# Altium PCB SCMLI_Snipped.PcbDoc (part 2 of 5)
Units mil, origin at the board's own origin, x right, y up, seen from the top; angles counter-clockwise.
Board outline 12129 x 3278 mil, 4 copper layers (Top Layer, GNDPlane, PowRet, Bottom Layer), stack 25.6 mil thick; 452 components, 391 nets, 1786 pads, 827 vias.
Unrouted connection lines stored in the file: 1.
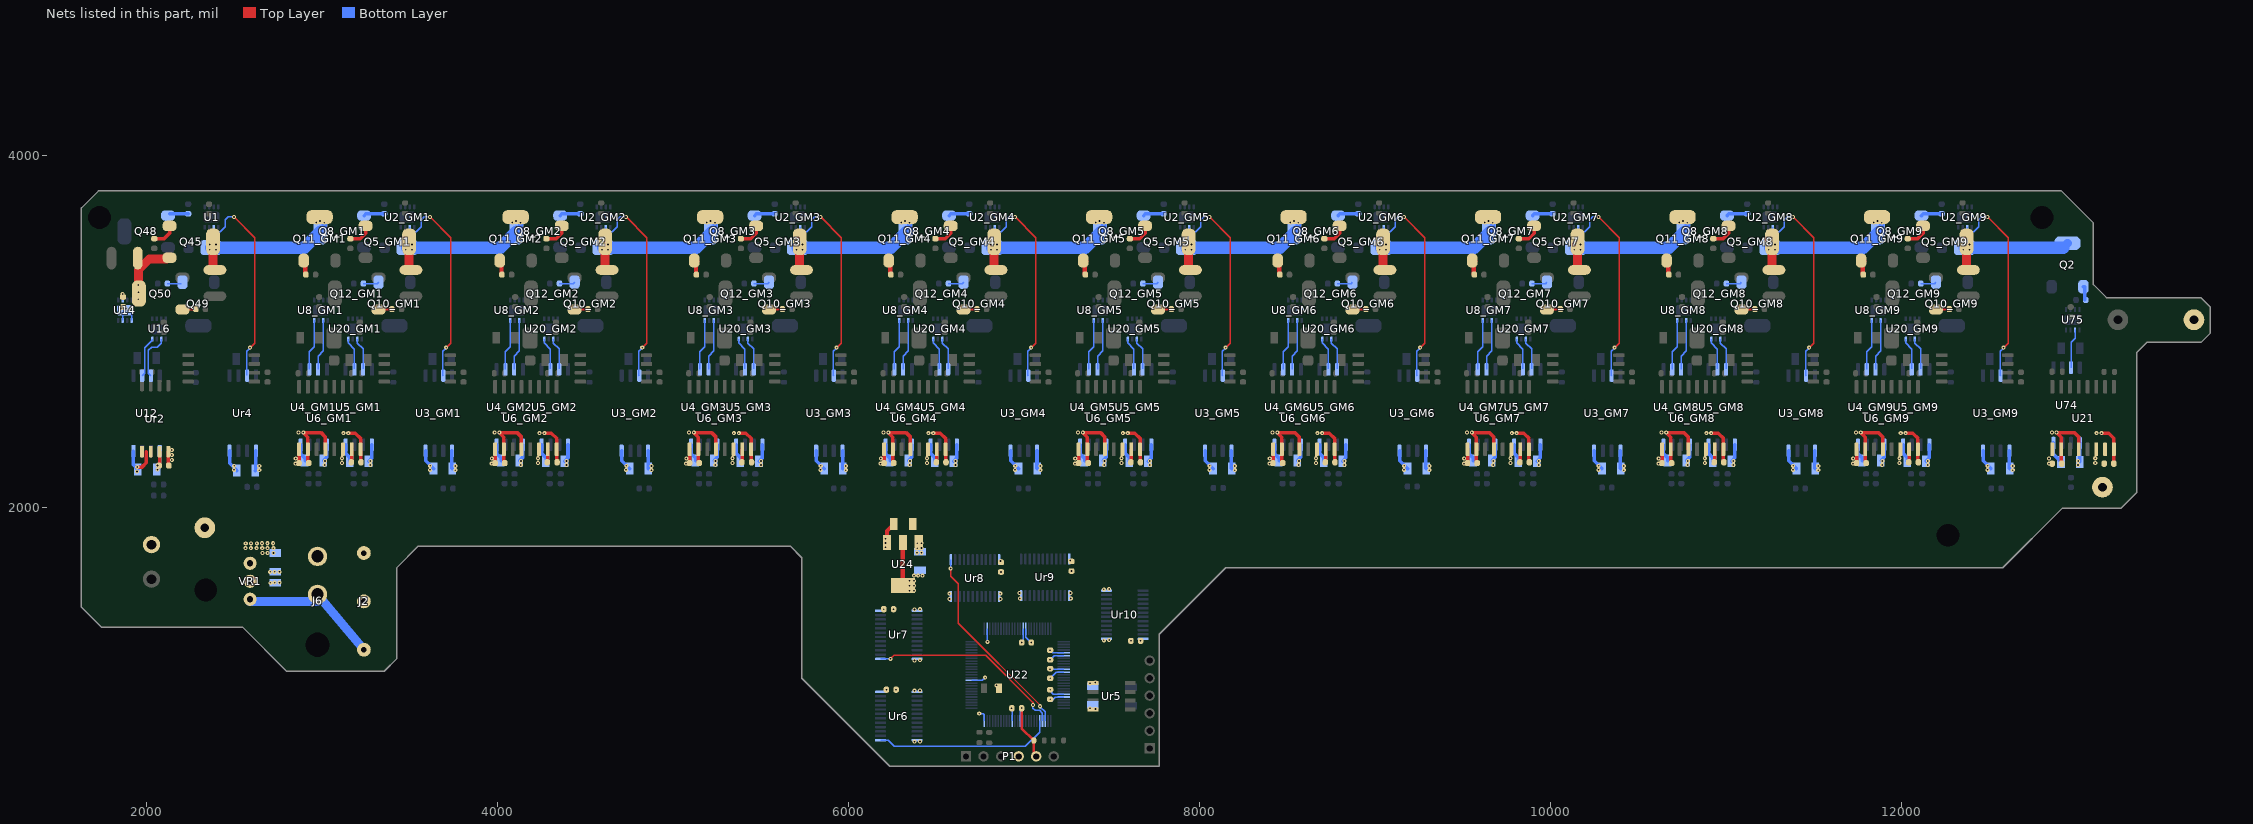
[diagram p4: the nets of this part, all layers, seen from the top]

## Components (designator, comment, footprint, x,y, rotation, side; value= is the part's Value field where it differs from the comment) (continued)
Ur1_GM4 "ADUM5028-5BRIZ" RI_8_1 6877,2790 r0 top value=Value (schematic designator Ur1)
Ur1_GM5 "ADUM5028-5BRIZ" RI_8_1 7985,2790 r0 top value=Value (schematic designator Ur1)
Ur1_GM6 "ADUM5028-5BRIZ" RI_8_1 9093,2790 r0 top value=Value (schematic designator Ur1)
Ur1_GM7 "ADUM5028-5BRIZ" RI_8_1 10201,2790 r0 top value=Value (schematic designator Ur1)
Ur1_GM8 "ADUM5028-5BRIZ" RI_8_1 11309,2790 r0 top value=Value (schematic designator Ur1)
Ur1_GM9 "ADUM5028-5BRIZ" RI_8_1 12417,2790 r0 top value=Value (schematic designator Ur1)
Ur2 "ADUM5028-5BRIZ" RI_8_1 2050,2504 r90 top value=Value
Ur3 "ADUM5028-5BRIZ" RI_8_1 2427,2790 r0 top value=Value
Ur4 "ISO7720FDWV" TI_DWV 2624,2320 r90 bottom
Ur5 "HCPL-0931" SOIC-8 7499,922 r180 top
Ur6 "Part Number: CY74FCT841T_DBQ_24" DBQ24 6287,809 r180 bottom value=Value
Ur7 "Part Number: CY74FCT841T_DBQ_24" DBQ24 6287,1272 r180 bottom value=Value
Ur8 "Part Number: CY74FCT841T_DBQ_24" DBQ24 6720.5,1595.5 r90 bottom value=Value
Ur9 "Part Number: CY74FCT841T_DBQ_24" DBQ24 7120.5,1599.5 r90 bottom value=Value
Ur10 "Part Number: CY74FCT841T_DBQ_24" DBQ24 7574.5,1386.5 r0 bottom value=Value
VR1 "L78series" L78_TO220_3 2591,1577 r90 top

## Footprints (in the part's own frame and the unit in brackets; to place one, negate y for a bottom-side part, rotate by r counter-clockwise, add the part's x,y. Pads: shape width x height; smd on the part's side, far side on the other; paste and mask are expansions set on the pad)
3_TEST_PIN [mm]
  round 2 hole 0.8: 1(-7,0) 2(0,0) 3(7,0)
0805 [mil] "Chip Inductor 2-Leads, Body 2.0x1.2mm, IPC Medium Density"
  rect 35x53.15 smd: 1(-42,0) 2(42,0)
  silkscreen extent -14,-23 14,23, body extent -40,-25 40,25, height 49
1608[0603] [mm] "Chip Capacitor, Body 1.6x0.8mm, IPC High Density"
  rrect75% 0.8x0.9 smd: 1(-0.7,0) 2(0.7,0)
  body extent -0.87,-0.48 0.87,0.48, height 1.3
1812 [mm] "Chip Capacitor, Body 4.5x3.2mm, IPC High Density"
  rrect100% 1.4x3.3 smd: 1(-1.9,0) 2(1.9,0)
  silkscreen extent -0.8,-1.55 0.8,1.55, body extent -2.4,-1.7 2.4,1.7, height 1.4
BatteryConnector_Molex_1720640002 [mm]
  round 3 hole 3.5 unplated paste+0 mask+0: 0(-7.3,0)
  round 2.8 hole 1.8: 1(0,0) 2(5.5,0)
  silkscreen extent -15.75,-4.06 6.22,4.19, body extent -15.74,-4.16 6.22,4.19, height 15.05
C1206 [mm] "Chip Capacitor, Body 3.2x1.6mm, IPC High Density"
  rect 1.1x1.7 smd: 1(-1.35,0) 2(1.35,0)
  silkscreen extent -0.4,-0.75 0.4,0.75, body extent -1.7,-0.9 1.7,0.9, height 1.3
DBQ24 [mil]
  rrect50% 63x14 smd paste+0 mask+0: 1(-104.5,137.5) 2(-104.5,112.5) 3(-104.5,87.5) 4(-104.5,62.5) 5(-104.5,37.5) 6(-104.5,12.5) 7(-104.5,-12.5) 8(-104.5,-37.5) 9(-104.5,-62.5) 10(-104.5,-87.5) 11(-104.5,-112.5) 12(-104.5,-137.5) 13(104.5,-137.5) 14(104.5,-112.5) 15(104.5,-87.5) 16(104.5,-62.5) 17(104.5,-37.5) 18(104.5,-12.5) 19(104.5,12.5) 20(104.5,37.5) 21(104.5,62.5) 22(104.5,87.5) 23(104.5,112.5) 24(104.5,137.5)
  silkscreen extent -156,-177 156,177
DFN-8_DD [mm]
  rrect50% 0.7x0.35 smd: 1(-1.475,0.975) 2(-1.475,0.325) 3(-1.475,-0.325) 4(-1.475,-0.975) 5(1.475,-0.975) 6(1.475,-0.325) 7(1.475,0.325) 8(1.475,0.975)
  rrect50% 1.58x2.35 smd: 3(0,0)
  silkscreen extent -1.68,-1.68 1.68,1.68
GNDOUT [mm]
  round 3 hole 1.27: 1(0,0)
HDR1X6 [mm] "Connector; Header; 6 Position"
  rect 1.5x1.5 hole 0.9: 1(0,0)
  round 1.5 hole 0.9: 2(2.54,0) 3(5.08,0) 4(7.62,0) 5(10.16,0) 6(12.7,0)
  silkscreen extent -1.27,-1.27 13.97,1.27
HVOUT [mm]
  round 3 hole 1.27: 1(0,0) 2(11,0)
J1-0603 [mm] "Chip Resistor, Body 1.6x0.8mm, IPC High Density"
  rrect75% 0.7x0.9 smd: 1(-0.75,0) 2(0.75,0)
  silkscreen extent -0.2,-0.35 0.2,0.35, body extent -0.85,-0.48 0.85,0.48, height 0.9
L78_TO220_3 [mm]
  round 1.9 hole 0.9: 1(-2.6,0) 2(0,0) 3(2.6,0)
  silkscreen extent -5.21,-2.29 5.21,2.29, body extent -5.2,-2.3 5.21,2.3, height 16.4
PHEONIXCONTACT_1757242 [mm]
  round 2.5 hole 1.4: 1(0,0) 2(5,0)
  silkscreen extent -4.06,-10 8.51,2.54, body extent -3.78,-7.4 8.38,4.7
RI_8_1 [mm]
  rrect50% 1.661x0.561 smd paste+0 mask+0: 1(-4.78,1.905) 2(-4.78,0.635) 3(-4.78,-0.635) 4(-4.78,-1.905) 5(4.78,-1.905) 6(4.78,-0.635) 7(4.78,0.635) 8(4.78,1.905)
  silkscreen extent -3.88,-3.05 3.88,3.05
SE30PAJ-M3 [mil] "600V diode"
  rrect50% 59x60 smd: 1(67,0)
  rrect50% 122x87 smd: 2(-61,0)
  silkscreen extent -100,-55 70,55
SOIC127P1030X265-16N [mil]
  rrect50% 78x22 smd: 1(-178,175) 2(-178,125) 3(-178,75) 4(-178,25) 5(-178,-25) 6(-178,-75) 7(-178,-125) 8(-178,-175) 9(178,-175) 10(178,-125) 11(178,-75) 12(178,-25) 13(178,25) 14(178,75) 15(178,125) 16(178,175)
  silkscreen extent -151,-250 150,248
SOIC-8 [mm]
  rect 1.55x0.6 smd: 1(-2.7,1.905) 2(-2.7,0.635) 3(-2.7,-0.635) 4(-2.7,-1.905) 5(2.7,-1.905) 6(2.7,-0.635) 7(2.7,0.635) 8(2.7,1.905)
  silkscreen extent -2.11,-2.5 1.77,2.87, body extent -1.99,-2.5 1.99,2.5, height 1.75
SOT223 [mm]
  rect 1.2x2.2 smd: 1(-2.3,0) 2(0,0) 3(2.3,0)
  rect 3.5x2.2 smd: 4(0,6.2)
  silkscreen extent -3.81,0.38 3.81,5.72
SOT233-3 [mm]
  rrect75% 1.5x2 smd: 1(-2.3,-3.15) 3(2.3,-3.15)
  rrect75% 3.8x2 smd: 2(0,3.15)
  silkscreen extent -2.54,-1.85 2.54,1.85
TI_DWV [mm]
  rrect50% 1.8x0.6 smd: 1(0,0) 2(0,-1.27) 3(0,-2.54) 4(0,-3.81) 5(10.9,-3.81) 6(10.9,-2.54) 7(10.9,-1.27) 8(10.9,0)
  silkscreen extent 1.73,-4.45 9.17,0.63
TQFP100_12X12MC- [mil]
  rect 70x9 smd paste+0 mask+0: 1(-262.5,188.98) 2(-262.5,173.23) 3(-262.5,157.48) 4(-262.5,141.73) 5(-262.5,125.98) 6(-262.5,110.24) 7(-262.5,94.49) 8(-262.5,78.74) 9(-262.5,62.99) 10(-262.5,47.24) 11(-262.5,31.5) 12(-262.5,15.75) 13(-262.5,0) 14(-262.5,-15.75) 15(-262.5,-31.5) 16(-262.5,-47.24) 17(-262.5,-62.99) 18(-262.5,-78.74) 19(-262.5,-94.49) 20(-262.5,-110.24) 21(-262.5,-125.98) 22(-262.5,-141.73) 23(-262.5,-157.48) 24(-262.5,-173.23) 25(-262.5,-188.98) 51(262.5,-188.98) 52(262.5,-173.23) 53(262.5,-157.48) 54(262.5,-141.73) 55(262.5,-125.98) 56(262.5,-110.24) 57(262.5,-94.49) 58(262.5,-78.74) 59(262.5,-62.99) 60(262.5,-47.24) 61(262.5,-31.5) 62(262.5,-15.75) 63(262.5,0) 64(262.5,15.75) 65(262.5,31.5) 66(262.5,47.24) 67(262.5,62.99) 68(262.5,78.74) 69(262.5,94.49) 70(262.5,110.24) 71(262.5,125.98) 72(262.5,141.73) 73(262.5,157.48) 74(262.5,173.23) 75(262.5,188.98)
  rect 9x70 smd paste+0 mask+0: 26(-188.98,-262.5) 27(-173.23,-262.5) 28(-157.48,-262.5) 29(-141.73,-262.5) 30(-125.98,-262.5) 31(-110.24,-262.5) 32(-94.49,-262.5) 33(-78.74,-262.5) 34(-62.99,-262.5) 35(-47.24,-262.5) 36(-31.5,-262.5) 37(-15.75,-262.5) 38(0,-262.5) 39(15.75,-262.5) 40(31.5,-262.5) 41(47.24,-262.5) 42(62.99,-262.5) 43(78.74,-262.5) 44(94.49,-262.5) 45(110.24,-262.5) 46(125.98,-262.5) 47(141.73,-262.5) 48(157.48,-262.5) 49(173.23,-262.5) 50(188.98,-262.5) 76(188.98,262.5) 77(173.23,262.5) 78(157.48,262.5) 79(141.73,262.5) 80(125.98,262.5) 81(110.24,262.5) 82(94.49,262.5) 83(78.74,262.5) 84(62.99,262.5) 85(47.24,262.5) 86(31.5,262.5) 87(15.75,262.5) 88(0,262.5) 89(-15.75,262.5) 90(-31.5,262.5) 91(-47.24,262.5) 92(-62.99,262.5) 93(-78.74,262.5) 94(-94.49,262.5) 95(-110.24,262.5) 96(-125.98,262.5) 97(-141.73,262.5) 98(-157.48,262.5) 99(-173.23,262.5) 100(-188.98,262.5)
  silkscreen extent -318,-318 318,318, body extent 0,0 10,10, height 10

## Part data
C3_GM1 C3_GM2 C3_GM3 C3_GM4 C3_GM5 C3_GM6 C3_GM7 C3_GM8 C3_GM9 C8_GM1 C8_GM2 C8_GM3 C8_GM4 C8_GM5 C8_GM6 C8_GM7 C8_GM8 C8_GM9 C9_GM1 C9_GM2 C9_GM3 C9_GM4 C9_GM5 C9_GM6 C9_GM7 C9_GM8 C9_GM9 C10_GM1 C10_GM2 C10_GM3 C10_GM4 C10_GM5 C10_GM6 C10_GM7 C10_GM8 C10_GM9 C12 C14 C15 C17_GM1 C17_GM2 C17_GM3 C17_GM4 C17_GM5 C17_GM6 C17_GM7 C17_GM8 C17_GM9 C18 C19 C20 C21 C22 C23 C25 C26 C29 C30 C71 C72 Cin Cr1_1_GM1 Cr1_1_GM2 Cr1_1_GM3 Cr1_1_GM4 Cr1_1_GM5 Cr1_1_GM6 Cr1_1_GM7 Cr1_1_GM8 Cr1_1_GM9 Cr1_2_GM1 Cr1_2_GM2 Cr1_2_GM3 Cr1_2_GM4 Cr1_2_GM5 Cr1_2_GM6 Cr1_2_GM7 Cr1_2_GM8 Cr1_2_GM9 Cr2_2 Cr2_3 Cr3_2 Cr3_3 Cr4_1 Cr4_2 Cr5_1 Cr5_2 Cr6 Cr7 Cr8 Cr9 Cr10 Cu1_1 Cu2_1_GM1 Cu2_1_GM2 Cu2_1_GM3 Cu2_1_GM4 Cu2_1_GM5 Cu2_1_GM6 Cu2_1_GM7 Cu2_1_GM8 Cu2_1_GM9 Cu3_1_GM1 Cu3_1_GM2 Cu3_1_GM3 Cu3_1_GM4 Cu3_1_GM5 Cu3_1_GM6 Cu3_1_GM7 Cu3_1_GM8 Cu3_1_GM9 Cu3_2_GM1 Cu3_2_GM2 Cu3_2_GM3 Cu3_2_GM4 Cu3_2_GM5 Cu3_2_GM6 Cu3_2_GM7 Cu3_2_GM8 Cu3_2_GM9 Cu4_1_GM1 Cu4_1_GM2 Cu4_1_GM3 Cu4_1_GM4 Cu4_1_GM5 Cu4_1_GM6 Cu4_1_GM7 Cu4_1_GM8 Cu4_1_GM9 Cu4_2_GM1 Cu4_2_GM2 Cu4_2_GM3 Cu4_2_GM4 Cu4_2_GM5 Cu4_2_GM6 Cu4_2_GM7 Cu4_2_GM8 Cu4_2_GM9 Cu5_1_GM1 Cu5_1_GM2 Cu5_1_GM3 Cu5_1_GM4 Cu5_1_GM5 Cu5_1_GM6 Cu5_1_GM7 Cu5_1_GM8 Cu5_1_GM9 Cu5_2_GM1 Cu5_2_GM2 Cu5_2_GM3 Cu5_2_GM4 Cu5_2_GM5 Cu5_2_GM6 Cu5_2_GM7 Cu5_2_GM8 Cu5_2_GM9 Cu8_1_GM1 Cu8_1_GM2 Cu8_1_GM3 Cu8_1_GM4 Cu8_1_GM5 Cu8_1_GM6 Cu8_1_GM7 Cu8_1_GM8 Cu8_1_GM9 Cu12_1 Cu12_2 Cu14_1 Cu16_1 Cu20_1_GM1 Cu20_1_GM2 Cu20_1_GM3 Cu20_1_GM4 Cu20_1_GM5 Cu20_1_GM6 Cu20_1_GM7 Cu20_1_GM8 Cu20_1_GM9 Cu74_1 Cu74_2 Cu75_1: "Capacitor (Semiconductor SIM Model)", LatestRevisionDate=29-May-2009, LatestRevisionNote="IPC-7351 Footprint Added.", PackageDescription="Chip Capacitor", PackageReference=C1206, Published=8-Jun-2000, Publisher="Altium Limited"
D5_GM1 D5_GM2 D5_GM3 D5_GM4 D5_GM5 D5_GM6 D5_GM7 D5_GM8 D5_GM9 D6_GM1 D6_GM2 D6_GM3 D6_GM4 D6_GM5 D6_GM6 D6_GM7 D6_GM8 D6_GM9 D12: library part SE30PAJ-M3
J1 J3 J6: "Header, 2-Pin", LatestRevisionDate=17-Jul-2002, LatestRevisionNote="Re-released for DXP Platform.", Publisher="Altium Limited"
J2: "Header, 3-Pin", LatestRevisionDate=17-Jul-2002, LatestRevisionNote="Re-released for DXP Platform.", Publisher="Altium Limited"
J4 J5: "Header, 1-Pin", LatestRevisionDate=17-Jul-2002, LatestRevisionNote="Re-released for DXP Platform.", Publisher="Altium Limited"
P1 P2: "Header, 6-Pin", LatestRevisionDate=17-Jul-2002, LatestRevisionNote="Re-released for DXP Platform.", Publisher="Altium Limited"
R1 R2 R4 R6 R8 R10 R16_GM1 R16_GM2 R16_GM3 R16_GM4 R16_GM5 R16_GM6 R16_GM7 R16_GM8 R16_GM9 R17_GM1 R17_GM2 R17_GM3 R17_GM4 R17_GM5 R17_GM6 R17_GM7 R17_GM8 R17_GM9 R18_GM1 R18_GM2 R18_GM3 R18_GM4 R18_GM5 R18_GM6 R18_GM7 R18_GM8 R18_GM9 R19_GM1 R19_GM2 R19_GM3 R19_GM4 R19_GM5 R19_GM6 R19_GM7 R19_GM8 R19_GM9 R20_GM1 R20_GM2 R20_GM3 R20_GM4 R20_GM5 R20_GM6 R20_GM7 R20_GM8 R20_GM9 R21_GM1 R21_GM2 R21_GM3 R21_GM4 R21_GM5 R21_GM6 R21_GM7 R21_GM8 R21_GM9 R22_GM1 R22_GM2 R22_GM3 R22_GM4 R22_GM5 R22_GM6 R22_GM7 R22_GM8 R22_GM9 R23_GM1 R23_GM2 R23_GM3 R23_GM4 R23_GM5 R23_GM6 R23_GM7 R23_GM8 R23_GM9 R24_GM1 R24_GM2 R24_GM3 R24_GM4 R24_GM5 R24_GM6 R24_GM7 R24_GM8 R24_GM9 R25_GM1 R25_GM2 R25_GM3 R25_GM4 R25_GM5 R25_GM6 R25_GM7 R25_GM8 R25_GM9 R98 R99 Rr4: library part Resistor_ST, "Resistor 0402 / 0603 / 0805"
R26 R27 R28 R29: "Resistor", LatestRevisionDate=29-May-2009, LatestRevisionNote="IPC-7351 Footprint Added.", PackageDescription="Chip Resistor", PackageReference=J1-0603, Published=8-Jun-2000, Publisher="Altium Limited"
U6_GM1 U6_GM2 U6_GM3 U6_GM4 U6_GM5 U6_GM6 U6_GM7 U6_GM8 U6_GM9 U21: "Isolatd 5V-5V DCDC power supply"
U22 Ur1_GM1 Ur1_GM2 Ur1_GM3 Ur1_GM4 Ur1_GM5 Ur1_GM6 Ur1_GM7 Ur1_GM8 Ur1_GM9 Ur2 Ur3: "No Description Available", Copyright="Copyright (C) 2018 Accelerated Designs. All rights reserved", RefDes=RefDes, Type=DEV
Ur6 Ur7 Ur8 Ur9 Ur10: library part CY74FCT841T_DBQ_, "10-Bit Bus-Interface D-Type Latches with 3-State Outputs", Manufacturer="Texas Instruments", Manufacturer_Part_Number=CY74FCT841T_DBQ_24, PACKAGE_DESIGNATOR=DBQ, Copyright="Copyright (C) 2018 Accelerated Designs. All rights reserved", Datasheet_URL=http://www.ti.com/lit/gpn/CY74FCT841T, FAMILY_NAME="D-TYPE LATCH", GENERIC_PART_NUMBER=CY74FCT841T, INDUSTRY_STD_PKG_TYPE=SSOP/QSOP, PIN_COUNT=24, RefDes=RefDes, Type=DEV, Vendor="Texas Instruments"
VR1: library part PM-REG-L78, "Positive Voltage Regulator", ComponentLink1Description="Manufacturer URL", ComponentLink1URL=http://www.st.com, DatasheetVersion=1/02/2011, PackageVersion=2011
Ur5: ComponentLink=http://www.digikey.com/product-detail/en/broadcom-limited/HCPL-0931/516-2702-5-ND/969355

## Free pads (board coordinates)
  round 0 hole 130: 4(1732,3650) 4(2338,1527) 4(12265,1839) 4(12800,3650)

## Via types
v1: diameter 23, hole 10, Top Layer to Bottom Layer, 827 vias

## Nets (pads, with @x,y where several pads share a name; then routed paths per layer and width w, separated by ;. In a path a pad name is that pad's centre, name@x,y a point inside that pad or via, vN(x,y) a via of type N, cw(c..) or ccw(c..) an arc to the next point about the centre after c; other vN are vias at no path point)
3V3: C19.2 C20.2 C21.2 C22.2 C23.2 C30.2 Cr5_2.2 P1.5 R26.2 U22.2 U22.16 U22.30 U22.37 U22.46 U22.62 U22.86 U24.2 U24.4 Ur5.8 | length 1146
  Top Layer w15: v1(6987.06,855.5) 6987.06,739.41 R26.2@7055.97,670.5 7055.97,593.03 P1.5@7069.5,579.5
  Top Layer w25: U24.4@6310,1553 U24.2@6310,1797.09
  Bottom Layer w8: U22.86@6700.88,1012.16 6763.16,1012.16 v1(6779,1028) ; U22.2@6790.16,1306.16 6790.16,1232.28 6790.44,1232 v1(6792,1232) ; U22.62@6979.13,781.16 6979.13,847.57 v1(6987.06,855.5) ; U22.16@7010.63,1306.16 7010.63,1258.93 v1(7041.56,1228) ; v1(7148.5,1183.5) 7162.36,1169.64 U22.30@7225.88,1169.64 ; v1(7149,904.44) 7151.56,904.44 7158.5,897.5 7178.67,917.67 U22.46@7225.88,917.67 ; v1(7149,1024.44) 7183.96,1059.41 U22.37@7225.88,1059.41
  other v1: 7407,850 7376,853 6347.42,1523.5 6373,1523.5 6347.85,1551.5 6373,1551.5 6347.85,1579.5 6373,1579.5 6373,1609 6397,1609 6422,1609
9V: C25.2 J2.1 J6.1 VR1.1 | length 849.4
  Bottom Layer w50: VR1.1@2591,1474.64 2591,1461.55 C25.2@2734,1461.55 2975,1461.55 J6.1@2975,1502.4 J2.1@3239,1186.82
+5V: C3_GM1.2 C3_GM2.2 C3_GM3.2 C3_GM4.2 C3_GM5.2 C3_GM6.2 C3_GM7.2 C3_GM8.2 C3_GM9.2 C10_GM1.2 C10_GM2.2 C10_GM3.2 C10_GM4.2 C10_GM5.2 C10_GM6.2 C10_GM7.2 C10_GM8.2 C10_GM9.2 C26.2 C29.2 C71.2 C72.2 Cr2_2.2 Cr4_1.2 Cr6.2 Cr7.2 Cr8.2 Cr9.2 Cr10.2 Cu3_1_GM1.2 Cu3_1_GM2.2 Cu3_1_GM3.2 Cu3_1_GM4.2 Cu3_1_GM5.2 Cu3_1_GM6.2 Cu3_1_GM7.2 Cu3_1_GM8.2 Cu3_1_GM9.2 Cu4_1_GM1.2 Cu4_1_GM2.2 Cu4_1_GM3.2 Cu4_1_GM4.2 Cu4_1_GM5.2 Cu4_1_GM6.2 Cu4_1_GM7.2 Cu4_1_GM8.2 Cu4_1_GM9.2 Cu5_1_GM1.2 Cu5_1_GM2.2 Cu5_1_GM3.2 Cu5_1_GM4.2 Cu5_1_GM5.2 Cu5_1_GM6.2 Cu5_1_GM7.2 Cu5_1_GM8.2 Cu5_1_GM9.2 Cu12_1.2 Cu14_1.2 Cu74_1.2 J2.3 U3_GM1.1 U3_GM2.1 U3_GM3.1 U3_GM4.1 U3_GM5.1 U3_GM6.1 U3_GM7.1 U3_GM8.1 U3_GM9.1 U4_GM1.1 U4_GM2.1 U4_GM3.1 U4_GM4.1 U4_GM5.1 U4_GM6.1 U4_GM7.1 U4_GM8.1 U4_GM9.1 U5_GM1.1 U5_GM2.1 U5_GM3.1 U5_GM4.1 U5_GM5.1 U5_GM6.1 U5_GM7.1 U5_GM8.1 U5_GM9.1 U6_GM1.1 U6_GM1.6 U6_GM1.7 U6_GM2.1 U6_GM2.6 U6_GM2.7 U6_GM3.1 U6_GM3.6 U6_GM3.7 U6_GM4.1 U6_GM4.6 U6_GM4.7 U6_GM5.1 U6_GM5.6 U6_GM5.7 U6_GM6.1 U6_GM6.6 U6_GM6.7 U6_GM7.1 U6_GM7.6 U6_GM7.7 U6_GM8.1 U6_GM8.6 U6_GM8.7 U6_GM9.1 U6_GM9.6 U6_GM9.7 U12.1 U14.6 U21.1 U21.6 U21.7 U24.3 U74.1 Ur2.3 Ur4.1 Ur6.24 Ur7.24 Ur8.24 Ur9.24 Ur10.24 VR1.3 | length 4673.8
  Top Layer w20: Cr2_2.2@2072.44,2236 2075,2238.56 Ur2.3@2075,2315.81 ; C3_GM1.2@2869.44,2250.17 2870,2250.73 U6_GM1.1@2870,2329 ; C10_GM1.2@3167.44,2255.17 3170,2257.73 U6_GM1.7@3170,2329 ; C3_GM2.2@3986.44,2250.17 3987,2250.73 U6_GM2.1@3987,2329 ; C10_GM2.2@4284.44,2255.17 4287,2257.73 U6_GM2.7@4287,2329 ; C3_GM3.2@5094.44,2250.17 5095,2250.73 U6_GM3.1@5095,2329 ; C10_GM3.2@5392.44,2255.17 5395,2257.73 U6_GM3.7@5395,2329 ; C3_GM4.2@6202.44,2250.17 6203,2250.73 U6_GM4.1@6203,2329 ; C10_GM4.2@6500.44,2255.17 6503,2257.73 U6_GM4.7@6503,2329 ; C3_GM5.2@7310.44,2250.17 7311,2250.73 U6_GM5.1@7311,2329 ; C10_GM5.2@7608.44,2255.17 7611,2257.73 U6_GM5.7@7611,2329 ; C3_GM6.2@8418.44,2250.17 8419,2250.73 U6_GM6.1@8419,2329 ; C10_GM6.2@8716.44,2255.17 8719,2257.73 U6_GM6.7@8719,2329 ; C3_GM7.2@9526.44,2250.17 9527,2250.73 U6_GM7.1@9527,2329 ; C10_GM7.2@9824.44,2255.17 9827,2257.73 U6_GM7.7@9827,2329 ; C3_GM8.2@10634.44,2250.17 10635,2250.73 U6_GM8.1@10635,2329 ; C10_GM8.2@10932.44,2255.17 10935,2257.73 U6_GM8.7@10935,2329 ; C3_GM9.2@11742.44,2250.17 11743,2250.73 U6_GM9.1@11743,2329 ; C10_GM9.2@12040.44,2255.17 12043,2257.73 U6_GM9.7@12043,2329
  Top Layer w25: U24.3@6219.45,1797.09 6219.45,1863.6 C29.2@6258.85,1903
  Bottom Layer w8: U14.6@1864.73,3179.21 v1(1864.73,3214.27)
  Bottom Layer w20: Cu12_1.2@2058.15,2214 2076,2231.85 U12.1@2076,2319 ; Cr4_1.2@2621.15,2208 2624,2210.85 Ur4.1@2624,2320 ; Cu4_1_GM1.2@3010.15,2265 3028.28,2283.13 U4_GM1.1@3028.28,2355 ; Cu5_1_GM1.2@3266.15,2261 3285,2279.85 U5_GM1.1@3285,2355 U5_GM1.1@3285,2356 ; U3_GM1.1@3741,2320 3741,2220.15 Cu3_1_GM1.2@3742.15,2219 ; Cu4_1_GM2.2@4127.15,2265 4145.28,2283.13 U4_GM2.1@4145.28,2355 ; Cu5_1_GM2.2@4383.15,2261 4402,2279.85 U5_GM2.1@4402,2355 U5_GM2.1@4402,2356 ; U3_GM2.1@4858,2320 4858,2220.15 Cu3_1_GM2.2@4859.15,2219 ; Cu4_1_GM3.2@5235.15,2265 5253.28,2283.13 U4_GM3.1@5253.28,2355 ; Cu5_1_GM3.2@5491.15,2261 5510,2279.85 U5_GM3.1@5510,2355 U5_GM3.1@5510,2356 ; U3_GM3.1@5966,2320 5966,2220.15 Cu3_1_GM3.2@5967.15,2219 ; Cu4_1_GM4.2@6343.15,2265 6361.28,2283.13 U4_GM4.1@6361.28,2355 ; Cu5_1_GM4.2@6599.15,2261 6618,2279.85 U5_GM4.1@6618,2355 U5_GM4.1@6618,2356 ; U3_GM4.1@7074,2320 7074,2220.15 Cu3_1_GM4.2@7075.15,2219 ; Cu4_1_GM5.2@7451.15,2265 7469.28,2283.13 U4_GM5.1@7469.28,2355 ; Cu5_1_GM5.2@7707.15,2261 7726,2279.85 U5_GM5.1@7726,2355 U5_GM5.1@7726,2356 ; U3_GM5.1@8182,2320 8182,2220.15 Cu3_1_GM5.2@8183.15,2219 ; Cu4_1_GM6.2@8559.15,2265 8577.28,2283.13 U4_GM6.1@8577.28,2355 ; Cu5_1_GM6.2@8815.15,2261 8834,2279.85 U5_GM6.1@8834,2355 U5_GM6.1@8834,2356 ; U3_GM6.1@9290,2320 9290,2220.15 Cu3_1_GM6.2@9291.15,2219 ; Cu4_1_GM7.2@9667.15,2265 9685.28,2283.13 U4_GM7.1@9685.28,2355 ; Cu5_1_GM7.2@9923.15,2261 9942,2279.85 U5_GM7.1@9942,2355 U5_GM7.1@9942,2356 ; U3_GM7.1@10398,2320 10398,2220.15 Cu3_1_GM7.2@10399.15,2219 ; Cu4_1_GM8.2@10775.15,2265 10793.28,2283.13 U4_GM8.1@10793.28,2355 ; Cu5_1_GM8.2@11031.15,2261 11050,2279.85 U5_GM8.1@11050,2355 U5_GM8.1@11050,2356 ; U3_GM8.1@11506,2320 11506,2220.15 Cu3_1_GM8.2@11507.15,2219 ; Cu4_1_GM9.2@11883.15,2265 11901.28,2283.13 U4_GM9.1@11901.28,2355 ; Cu5_1_GM9.2@12139.15,2261 12158,2279.85 U5_GM9.1@12158,2355 U5_GM9.1@12158,2356 ; U3_GM9.1@12614,2320 12614,2220.15 Cu3_1_GM9.2@12615.15,2219 ; Cu74_1.2@13014.15,2257 13014.15,2364.15 U74.1@13015,2365
  other v1: 6215.94,959.5 7664.06,1237.5 6201.44,1418 6865.42,1692.5 7263.5,1695.5 2660.85,1738.15 2690.85,1738.15 2724,1738.15 2565,1765.29 2595,1765.29 2628.15,1765.29 2660,1765.86 2690,1765.86 2723.15,1765.86 6210.27,1770.5 2566,1793 2596,1793 2629.15,1793 2659,1793.57 2689,1793.57 2722.15,1793.57 6210.27,1795.5 6210.27,1819.5 2643,2210 3760,2210 4877,2210 5985,2210 7093,2210 8201,2210 9309,2210 10417,2210 11525,2210 12633,2210 2064,2213 2643,2234 3760,2234 4877,2234 5985,2234 7093,2234 8201,2234 9309,2234 10417,2234 11525,2234 12633,2234 2064,2237 3016,2239 3276,2239 4133,2239 4393,2239 5241,2239 5501,2239 6349,2239 6609,2239 7457,2239 7717,2239 8565,2239 8825,2239 9673,2239 9933,2239 10781,2239 11041,2239 11889,2239 12149,2239 13005,2239 2850,2247 3967,2247 5075,2247 6183,2247 7291,2247 8399,2247 9507,2247 10615,2247 11723,2247 12839,2247 3114,2251 4231,2251 5339,2251 6447,2251 7555,2251 8663,2251 9771,2251 10879,2251 11987,2251 13103,2251 3017,2262 3276,2262 4134,2262 4393,2262 5242,2262 5501,2262 6350,2262 6609,2262 7458,2262 7717,2262 8566,2262 8825,2262 9674,2262 9933,2262 10782,2262 11041,2262 11890,2262 12149,2262 13006,2262 2851,2277 3968,2277 5076,2277 6184,2277 7292,2277 8400,2277 9508,2277 10616,2277 11724,2277 12840,2277 3114,2278 4231,2278 5339,2278 6447,2278 7555,2278 8663,2278 9771,2278 10879,2278 11987,2278 13103,2278
GATE_A1: Q48.1 R1.2 | length 105.2
  Bottom Layer w20: Q48.1@2132.79,3670 R1.2@2238,3670
GATE_A_GM1: Q8_GM1.1 R21_GM1.2 | length 118.7
  Bottom Layer w20: Q8_GM1.1@3240.22,3660.43 3249.79,3670 R21_GM1.2@3355,3670
GATE_A_GM2: Q8_GM2.1 R21_GM2.2 | length 118.7
  Bottom Layer w20: Q8_GM2.1@4357.22,3660.43 4366.79,3670 R21_GM2.2@4472,3670
GATE_A_GM3: Q8_GM3.1 R21_GM3.2 | length 118.7
  Bottom Layer w20: Q8_GM3.1@5465.22,3660.43 5474.79,3670 R21_GM3.2@5580,3670
GATE_A_GM4: Q8_GM4.1 R21_GM4.2 | length 118.7
  Bottom Layer w20: Q8_GM4.1@6573.22,3660.43 6582.79,3670 R21_GM4.2@6688,3670
GATE_A_GM5: Q8_GM5.1 R21_GM5.2 | length 118.7
  Bottom Layer w20: Q8_GM5.1@7681.22,3660.43 7690.79,3670 R21_GM5.2@7796,3670
GATE_A_GM6: Q8_GM6.1 R21_GM6.2 | length 118.7
  Bottom Layer w20: Q8_GM6.1@8789.22,3660.43 8798.79,3670 R21_GM6.2@8904,3670
GATE_A_GM7: Q8_GM7.1 R21_GM7.2 | length 118.7
  Bottom Layer w20: Q8_GM7.1@9897.22,3660.43 9906.79,3670 R21_GM7.2@10012,3670
GATE_A_GM8: Q8_GM8.1 R21_GM8.2 | length 118.7
  Bottom Layer w20: Q8_GM8.1@11005.22,3660.43 11014.79,3670 R21_GM8.2@11120,3670
GATE_A_GM9: Q8_GM9.1 R21_GM9.2 | length 118.7
  Bottom Layer w20: Q8_GM9.1@12113.22,3660.43 12122.79,3670 R21_GM9.2@12228,3670
GATE_B11: Q2.1 R99.2 | length 82.1
  Bottom Layer w20: Q2.1@13035.55,3254.98 13042.71,3254.98 R99.2@13042.71,3180
GATE_B_GM1: Q11_GM1.1 R22_GM1.2 | length 75.5
  Top Layer w25: R22_GM1.2@2906,3327.56 2906,3392.54 Q11_GM1.1@2913.45,3399.98
GATE_B_GM2: Q11_GM2.1 R22_GM2.2 | length 75.5
  Top Layer w25: R22_GM2.2@4023,3327.56 4023,3392.54 Q11_GM2.1@4030.45,3399.98
GATE_B_GM3: Q11_GM3.1 R22_GM3.2 | length 75.5
  Top Layer w25: R22_GM3.2@5131,3327.56 5131,3392.54 Q11_GM3.1@5138.45,3399.98
GATE_B_GM4: Q11_GM4.1 R22_GM4.2 | length 75.5
  Top Layer w25: R22_GM4.2@6239,3327.56 6239,3392.54 Q11_GM4.1@6246.45,3399.98
GATE_B_GM5: Q11_GM5.1 R22_GM5.2 | length 75.5
  Top Layer w25: R22_GM5.2@7347,3327.56 7347,3392.54 Q11_GM5.1@7354.45,3399.98
GATE_B_GM6: Q11_GM6.1 R22_GM6.2 | length 75.5
  Top Layer w25: R22_GM6.2@8455,3327.56 8455,3392.54 Q11_GM6.1@8462.45,3399.98
GATE_B_GM7: Q11_GM7.1 R22_GM7.2 | length 75.5
  Top Layer w25: R22_GM7.2@9563,3327.56 9563,3392.54 Q11_GM7.1@9570.45,3399.98
GATE_B_GM8: Q11_GM8.1 R22_GM8.2 | length 75.5
  Top Layer w25: R22_GM8.2@10671,3327.56 10671,3392.54 Q11_GM8.1@10678.45,3399.98
GATE_B_GM9: Q11_GM9.1 R22_GM9.2 | length 75.5
  Top Layer w25: R22_GM9.2@11779,3327.56 11779,3392.54 Q11_GM9.1@11786.45,3399.98
GATE_C1: Q45.1 R10.2 | length 141.6
  Top Layer w20: R10.2@2045,3528.56 2100.56,3528.56 2131.98,3559.98 Q45.1@2131.98,3601.55
GATE_C_GM1: Q5_GM1.1 R23_GM1.2 | length 141.6
  Top Layer w20: R23_GM1.2@3162,3528.56 3217.56,3528.56 3248.98,3559.98 Q5_GM1.1@3248.98,3601.55
GATE_C_GM2: Q5_GM2.1 R23_GM2.2 | length 141.6
  Top Layer w20: R23_GM2.2@4279,3528.56 4334.56,3528.56 4365.98,3559.98 Q5_GM2.1@4365.98,3601.55
GATE_C_GM3: Q5_GM3.1 R23_GM3.2 | length 141.6
  Top Layer w20: R23_GM3.2@5387,3528.56 5442.56,3528.56 5473.98,3559.98 Q5_GM3.1@5473.98,3601.55
GATE_C_GM4: Q5_GM4.1 R23_GM4.2 | length 141.6
  Top Layer w20: R23_GM4.2@6495,3528.56 6550.56,3528.56 6581.98,3559.98 Q5_GM4.1@6581.98,3601.55
GATE_C_GM5: Q5_GM5.1 R23_GM5.2 | length 141.6
  Top Layer w20: R23_GM5.2@7603,3528.56 7658.56,3528.56 7689.98,3559.98 Q5_GM5.1@7689.98,3601.55
GATE_C_GM6: Q5_GM6.1 R23_GM6.2 | length 141.6
  Top Layer w20: R23_GM6.2@8711,3528.56 8766.56,3528.56 8797.98,3559.98 Q5_GM6.1@8797.98,3601.55
GATE_C_GM7: Q5_GM7.1 R23_GM7.2 | length 141.6
  Top Layer w20: R23_GM7.2@9819,3528.56 9874.56,3528.56 9905.98,3559.98 Q5_GM7.1@9905.98,3601.55
GATE_C_GM8: Q5_GM8.1 R23_GM8.2 | length 141.6
  Top Layer w20: R23_GM8.2@10927,3528.56 10982.56,3528.56 11013.98,3559.98 Q5_GM8.1@11013.98,3601.55
GATE_C_GM9: Q5_GM9.1 R23_GM9.2 | length 141.6
  Top Layer w20: R23_GM9.2@12035,3528.56 12090.56,3528.56 12121.98,3559.98 Q5_GM9.1@12121.98,3601.55
GATE_D1: Q50.1 R6.2 | length 72.9
  Top Layer w10: Q50.1@2205.29,3125.58 R6.2@2278.17,3125.58
GATE_D_GM1: Q12_GM1.1 R24_GM1.2 | length 80.7
  Top Layer w10: Q12_GM1.1@3322.29,3125.58 3395.17,3125.58 R24_GM1.2@3400.72,3131.13
GATE_D_GM2: Q12_GM2.1 R24_GM2.2 | length 80.7
  Top Layer w10: Q12_GM2.1@4439.29,3125.58 4512.17,3125.58 R24_GM2.2@4517.72,3131.13
GATE_D_GM3: Q12_GM3.1 R24_GM3.2 | length 80.7
  Top Layer w10: Q12_GM3.1@5547.29,3125.58 5620.17,3125.58 R24_GM3.2@5625.72,3131.13
GATE_D_GM4: Q12_GM4.1 R24_GM4.2 | length 80.7
  Top Layer w10: Q12_GM4.1@6655.29,3125.58 6728.17,3125.58 R24_GM4.2@6733.72,3131.13
GATE_D_GM5: Q12_GM5.1 R24_GM5.2 | length 80.7
  Top Layer w10: Q12_GM5.1@7763.29,3125.58 7836.17,3125.58 R24_GM5.2@7841.72,3131.13
GATE_D_GM6: Q12_GM6.1 R24_GM6.2 | length 80.7
  Top Layer w10: Q12_GM6.1@8871.29,3125.58 8944.17,3125.58 R24_GM6.2@8949.72,3131.13
GATE_D_GM7: Q12_GM7.1 R24_GM7.2 | length 80.7
  Top Layer w10: Q12_GM7.1@9979.29,3125.58 10052.17,3125.58 R24_GM7.2@10057.72,3131.13
GATE_D_GM8: Q12_GM8.1 R24_GM8.2 | length 80.7
  Top Layer w10: Q12_GM8.1@11087.29,3125.58 11160.17,3125.58 R24_GM8.2@11165.72,3131.13
GATE_D_GM9: Q12_GM9.1 R24_GM9.2 | length 80.7
  Top Layer w10: Q12_GM9.1@12195.29,3125.58 12268.17,3125.58 R24_GM9.2@12273.72,3131.13
GATE_E1: Q49.1 R8.2 | length 77.9
  Bottom Layer w8: R8.2@2119.56,3273 Q49.1@2197.43,3273
GATE_E_GM1: Q10_GM1.1 R25_GM1.2 | length 89.2
  Bottom Layer w8: R25_GM1.2@3236.56,3273 3314.43,3273 Q10_GM1.1@3322.45,3281.02
GATE_E_GM2: Q10_GM2.1 R25_GM2.2 | length 89.2
  Bottom Layer w8: R25_GM2.2@4353.56,3273 4431.43,3273 Q10_GM2.1@4439.45,3281.02
GATE_E_GM3: Q10_GM3.1 R25_GM3.2 | length 89.2
  Bottom Layer w8: R25_GM3.2@5461.56,3273 5539.43,3273 Q10_GM3.1@5547.45,3281.02
GATE_E_GM4: Q10_GM4.1 R25_GM4.2 | length 89.2
  Bottom Layer w8: R25_GM4.2@6569.56,3273 6647.43,3273 Q10_GM4.1@6655.45,3281.02
GATE_E_GM5: Q10_GM5.1 R25_GM5.2 | length 89.2
  Bottom Layer w8: R25_GM5.2@7677.56,3273 7755.43,3273 Q10_GM5.1@7763.45,3281.02
GATE_E_GM6: Q10_GM6.1 R25_GM6.2 | length 89.2
  Bottom Layer w8: R25_GM6.2@8785.56,3273 8863.43,3273 Q10_GM6.1@8871.45,3281.02
GATE_E_GM7: Q10_GM7.1 R25_GM7.2 | length 89.2
  Bottom Layer w8: R25_GM7.2@9893.56,3273 9971.43,3273 Q10_GM7.1@9979.45,3281.02
GATE_E_GM8: Q10_GM8.1 R25_GM8.2 | length 89.2
  Bottom Layer w8: R25_GM8.2@11001.56,3273 11079.43,3273 Q10_GM8.1@11087.45,3281.02
GATE_E_GM9: Q10_GM9.1 R25_GM9.2 | length 89.2
  Bottom Layer w8: R25_GM9.2@12109.56,3273 12187.43,3273 Q10_GM9.1@12195.45,3281.02
GND: C3_GM1.1 C3_GM2.1 C3_GM3.1 C3_GM4.1 C3_GM5.1 C3_GM6.1 C3_GM7.1 C3_GM8.1 C3_GM9.1 C10_GM1.1 C10_GM2.1 C10_GM3.1 C10_GM4.1 C10_GM5.1 C10_GM6.1 C10_GM7.1 C10_GM8.1 C10_GM9.1 C18.2 C19.1 C20.1 C21.1 C22.1 C23.1 C25.1 C26.1 C29.1 C30.1 C71.1 C72.1 Cin.1 Cr2_2.1 Cr4_1.1 Cr5_2.1 Cr6.1 Cr7.1 Cr8.1 Cr9.1 Cr10.1 Cu3_1_GM1.1 Cu3_1_GM2.1 Cu3_1_GM3.1 Cu3_1_GM4.1 Cu3_1_GM5.1 Cu3_1_GM6.1 Cu3_1_GM7.1 Cu3_1_GM8.1 Cu3_1_GM9.1 Cu4_1_GM1.1 Cu4_1_GM2.1 Cu4_1_GM3.1 Cu4_1_GM4.1 Cu4_1_GM5.1 Cu4_1_GM6.1 Cu4_1_GM7.1 Cu4_1_GM8.1 Cu4_1_GM9.1 Cu5_1_GM1.1 Cu5_1_GM2.1 Cu5_1_GM3.1 Cu5_1_GM4.1 Cu5_1_GM5.1 Cu5_1_GM6.1 Cu5_1_GM7.1 Cu5_1_GM8.1 Cu5_1_GM9.1 Cu12_1.1 Cu14_1.1 Cu74_1.1 J1.1 J2.2 J3.2 J4.1 J5.1 J6.2 P1.4 Q45.3 Q50.2 U3_GM1.4 U3_GM2.4 U3_GM3.4 U3_GM4.4 U3_GM5.4 U3_GM6.4 U3_GM7.4 U3_GM8.4 U3_GM9.4 U4_GM1.4 U4_GM2.4 U4_GM3.4 U4_GM4.4 U4_GM5.4 U4_GM6.4 U4_GM7.4 U4_GM8.4 U4_GM9.4 U5_GM1.4 U5_GM2.4 U5_GM3.4 U5_GM4.4 U5_GM5.4 U5_GM6.4 U5_GM7.4 U5_GM8.4 U5_GM9.4 U6_GM1.2 U6_GM1.4 U6_GM1.8 U6_GM2.2 U6_GM2.4 U6_GM2.8 U6_GM3.2 U6_GM3.4 U6_GM3.8 U6_GM4.2 U6_GM4.4 U6_GM4.8 U6_GM5.2 U6_GM5.4 U6_GM5.8 U6_GM6.2 U6_GM6.4 U6_GM6.8 U6_GM7.2 U6_GM7.4 U6_GM7.8 U6_GM8.2 U6_GM8.4 U6_GM8.8 U6_GM9.2 U6_GM9.4 U6_GM9.8 U12.4 U14.1 U14.3 U21.2 U21.4 U21.8 U22.15 U22.31 U22.36 U22.45 U22.65 U22.75 U24.1 U74.4 Ur2.1 Ur2.2 Ur2.4 Ur4.4 Ur5.5 Ur6.1 Ur6.12 Ur7.1 Ur7.12 Ur8.1 Ur8.12 Ur9.1 Ur9.12 Ur10.1 Ur10.12 VR1.2 | length 10474.5
  Top Layer w20: v1(1948,2228) 1975,2228 1999,2252 1999,2314.21 1999.79,2315 ; Ur2.4@2125,2315.81 2125,2238.56 Cr2_2.1@2127.56,2236 ; C3_GM1.1@2920,2254.73 U6_GM1.2@2920,2329 2920,2398.5 v1(2894,2424.5) 2994.5,2424.5 3020,2399 U6_GM1.4@3020,2329 ; v1(3150,2421) 3190,2421 3220,2391 U6_GM1.8@3220,2329 3220,2257.73 C10_GM1.1@3222.56,2255.17 ; C3_GM2.1@4037,2254.73 U6_GM2.2@4037,2329 4037,2398.5 v1(4011,2424.5) 4111.5,2424.5 4137,2399 U6_GM2.4@4137,2329 ; v1(4267,2421) 4307,2421 4337,2391 U6_GM2.8@4337,2329 4337,2257.73 C10_GM2.1@4339.56,2255.17 ; C3_GM3.1@5145,2254.73 U6_GM3.2@5145,2329 5145,2398.5 v1(5119,2424.5) 5219.5,2424.5 5245,2399 U6_GM3.4@5245,2329 ; v1(5375,2421) 5415,2421 5445,2391 U6_GM3.8@5445,2329 5445,2257.73 C10_GM3.1@5447.56,2255.17 ; C3_GM4.1@6253,2254.73 U6_GM4.2@6253,2329 6253,2398.5 v1(6227,2424.5) 6327.5,2424.5 6353,2399 U6_GM4.4@6353,2329 ; v1(6483,2421) 6523,2421 6553,2391 U6_GM4.8@6553,2329 6553,2257.73 C10_GM4.1@6555.56,2255.17 ; C3_GM5.1@7361,2254.73 U6_GM5.2@7361,2329 7361,2398.5 v1(7335,2424.5) 7435.5,2424.5 7461,2399 U6_GM5.4@7461,2329 ; v1(7591,2421) 7631,2421 7661,2391 U6_GM5.8@7661,2329 7661,2257.73 C10_GM5.1@7663.56,2255.17 ; C3_GM6.1@8469,2254.73 U6_GM6.2@8469,2329 8469,2398.5 v1(8443,2424.5) 8543.5,2424.5 8569,2399 U6_GM6.4@8569,2329 ; v1(8699,2421) 8739,2421 8769,2391 U6_GM6.8@8769,2329 8769,2257.73 C10_GM6.1@8771.56,2255.17 ; C3_GM7.1@9577,2254.73 U6_GM7.2@9577,2329 9577,2398.5 v1(9551,2424.5) 9651.5,2424.5 9677,2399 U6_GM7.4@9677,2329 ; v1(9807,2421) 9847,2421 9877,2391 U6_GM7.8@9877,2329 9877,2257.73 C10_GM7.1@9879.56,2255.17 ; C3_GM8.1@10685,2254.73 U6_GM8.2@10685,2329 10685,2398.5 v1(10659,2424.5) 10759.5,2424.5 10785,2399 U6_GM8.4@10785,2329 ; v1(10915,2421) 10955,2421 10985,2391 U6_GM8.8@10985,2329 10985,2257.73 C10_GM8.1@10987.56,2255.17 ; C3_GM9.1@11793,2254.73 U6_GM9.2@11793,2329 11793,2398.5 v1(11767,2424.5) 11867.5,2424.5 11893,2399 U6_GM9.4@11893,2329 ; v1(12023,2421) 12063,2421 12093,2391 U6_GM9.8@12093,2329 12093,2257.73 C10_GM9.1@12095.56,2255.17 ; C72.1@12909,2254.73 U21.2@12909,2329 12909,2398.5 v1(12883,2424.5) 12983.5,2424.5 13009,2399 U21.4@13009,2329 ; v1(13139,2421) 13179,2421 13209,2391 U21.8@13209,2329 C71.1@13209,2257.73
  Top Layer w50: v1(1954.73,3224) 1954.73,3351.73 2016,3413 Q45.3@2114.54,3413
  Bottom Layer w8: U14.3@1864.73,3063.07 U14.3@1864.73,3108.34 ; v1(1912,3131.13) 1915.91,3127.23 U14.1@1915.91,3063.07 ; v1(6745,822.5) 6767.91,822.5 6774.41,816 U22.75@6774.41,781.16 ; v1(6928.94,853.5) 6931.89,850.55 U22.65@6931.89,781.16 ; v1(6986.44,1228) 6986.44,1231.44 6994.88,1239.88 U22.15@6994.88,1306.16 ; v1(7147.5,1075.5) 7147.85,1075.15 U22.36@7225.88,1075.15 ; v1(7147.5,1129.5) 7171.89,1153.89 U22.31@7225.88,1153.89 ; v1(7149,959.56) 7149,952 7167.58,933.42 U22.45@7225.88,933.42
  Bottom Layer w20: U12.4@1926,2319 1926,2239.85 Cu12_1.1@1951.85,2214 ; Ur4.4@2474,2320 2474,2248.85 Cr4_1.1@2514.85,2208 ; U4_GM1.4@2878.28,2355 2878.28,2302.72 2903.85,2277.15 Cu4_1_GM1.1@2903.85,2265 ; U5_GM1.4@3135,2356 U5_GM1.4@3135,2355 3135,2304.87 3159.85,2280.02 Cu5_1_GM1.1@3159.85,2261 ; U3_GM1.4@3591,2320 3591,2263.85 Cu3_1_GM1.1@3635.85,2219 ; U4_GM2.4@3995.28,2355 3995.28,2302.72 4020.85,2277.15 Cu4_1_GM2.1@4020.85,2265 ; U5_GM2.4@4252,2356 U5_GM2.4@4252,2355 4252,2304.87 4276.85,2280.02 Cu5_1_GM2.1@4276.85,2261 ; U3_GM2.4@4708,2320 4708,2263.85 Cu3_1_GM2.1@4752.85,2219 ; U4_GM3.4@5103.28,2355 5103.28,2302.72 5128.85,2277.15 Cu4_1_GM3.1@5128.85,2265 ; U5_GM3.4@5360,2356 U5_GM3.4@5360,2355 5360,2304.87 5384.85,2280.02 Cu5_1_GM3.1@5384.85,2261 ; U3_GM3.4@5816,2320 5816,2263.85 Cu3_1_GM3.1@5860.85,2219 ; U4_GM4.4@6211.28,2355 6211.28,2302.72 6236.85,2277.15 Cu4_1_GM4.1@6236.85,2265 ; U5_GM4.4@6468,2356 U5_GM4.4@6468,2355 6468,2304.87 6492.85,2280.02 Cu5_1_GM4.1@6492.85,2261 ; U3_GM4.4@6924,2320 6924,2263.85 Cu3_1_GM4.1@6968.85,2219 ; U4_GM5.4@7319.28,2355 7319.28,2302.72 7344.85,2277.15 Cu4_1_GM5.1@7344.85,2265 ; U5_GM5.4@7576,2356 U5_GM5.4@7576,2355 7576,2304.87 7600.85,2280.02 Cu5_1_GM5.1@7600.85,2261 ; U3_GM5.4@8032,2320 8032,2263.85 Cu3_1_GM5.1@8076.85,2219 ; U4_GM6.4@8427.28,2355 8427.28,2302.72 8452.85,2277.15 Cu4_1_GM6.1@8452.85,2265 ; U5_GM6.4@8684,2356 U5_GM6.4@8684,2355 8684,2304.87 8708.85,2280.02 Cu5_1_GM6.1@8708.85,2261 ; U3_GM6.4@9140,2320 9140,2263.85 Cu3_1_GM6.1@9184.85,2219 ; U4_GM7.4@9535.28,2355 9535.28,2302.72 9560.85,2277.15 Cu4_1_GM7.1@9560.85,2265 ; U5_GM7.4@9792,2356 U5_GM7.4@9792,2355 9792,2304.87 9816.85,2280.02 Cu5_1_GM7.1@9816.85,2261 ; U3_GM7.4@10248,2320 10248,2263.85 Cu3_1_GM7.1@10292.85,2219 ; U4_GM8.4@10643.28,2355 10643.28,2302.72 10668.85,2277.15 Cu4_1_GM8.1@10668.85,2265 ; U5_GM8.4@10900,2356 U5_GM8.4@10900,2355 10900,2304.87 10924.85,2280.02 Cu5_1_GM8.1@10924.85,2261 ; U3_GM8.4@11356,2320 11356,2263.85 Cu3_1_GM8.1@11400.85,2219 ; U4_GM9.4@11751.28,2355 11751.28,2302.72 11776.85,2277.15 Cu4_1_GM9.1@11776.85,2265 ; U5_GM9.4@12008,2356 U5_GM9.4@12008,2355 12008,2304.87 12032.85,2280.02 Cu5_1_GM9.1@12032.85,2261 ; U3_GM9.4@12464,2320 12464,2263.85 Cu3_1_GM9.1@12508.85,2219 ; U74.4@12865,2365 12865,2299.85 Cu74_1.1@12907.85,2257
  other v1: 6376,663.06 6407,664.56 6376,953.44 6407,954.94 6271.06,959.5 6843,984 7376,996 7406,1000 6376,1126.06 6407,1127.56 7608.94,1237.5 7454.5,1240.56 7485.5,1242.06 6376,1416.44 6256.56,1418 6407,1417.94 6576.06,1475.5 6866.44,1475.5 6976.06,1479.5 7266.44,1479.5 6574.56,1506.5 6864.94,1506.5 6974.56,1510.5 7264.94,1510.5 7454.5,1530.94 7485.5,1532.44 2705.85,1568.15 2730.85,1569 2759,1569 6869.5,1629.94 2705.15,1630.85 2731.15,1630.85 2759,1630.85 7270.5,1634.94 6390.42,1739.5 6415.85,1739.5 6391.42,1765.5 6415.42,1766 6391.85,1793.5 6416.42,1794 1947,2202 2499,2212 3616,2212 4733,2212 5841,2212 6949,2212 8057,2212 9165,2212 10273,2212 11381,2212 12489,2212 2500,2235 3617,2235 4734,2235 5842,2235 6950,2235 8058,2235 9166,2235 10274,2235 11382,2235 12490,2235 2145,2268 2145,2297 2145,2325 3122,2421 4239,2421 5347,2421 6455,2421 7563,2421 8671,2421 9779,2421 10887,2421 11995,2421 13111,2421 2867,2424.5 3984,2424.5 5092,2424.5 6200,2424.5 7308,2424.5 8416,2424.5 9524,2424.5 10632,2424.5 11740,2424.5 12856,2424.5 1854,3131.13 1881,3131.13 1953,3184 1953,3264.31
IN2: C12.2 D12.2 Q8_GM1.2 Q11_GM1.2 Q45.2 | length 916.7
  Top Layer w50: C12.2@2379,3362.09 Q45.2@2379,3506.62
  Bottom Layer w30: Q8_GM1.2@2990,3520 2992.19,3522.19 Q8_GM1.2@2992.19,3569.88 3014,3591.69 v1(3014,3620)
  Bottom Layer w70: D12.2@2368,3478 2900.31,3478 Q8_GM1.2@2992.19,3569.88
  other v1: 2361.28,3466.13 2396.28,3466.13 2361.28,3496.13 2396.28,3496.13 2968,3620.63 2989,3629
IN3: C8_GM1.2 D5_GM1.2 Q5_GM1.2 Q8_GM2.2 Q11_GM2.2 | length 955.7
  Top Layer w10: Q5_GM1.2@3482.29,3541.13 3493.28,3552.12 3493.28,3571.13 Q5_GM1.2@3498.28,3576.13
  Top Layer w30: Q5_GM1.2@3473.28,3529.34 Q5_GM1.2@3496,3506.62
  Top Layer w50: Q5_GM1.2@3496,3506.62 3496,3362.09 C8_GM1.2@3507.29,3350.8
  Bottom Layer w30: Q8_GM2.2@4109.19,3569.88 4131,3591.69 v1(4131,3620)
  Bottom Layer w70: D5_GM1.2@3485,3478 4017.31,3478 Q8_GM2.2@4109.19,3569.88
  other v1: 3478.28,3466.13 3513.28,3466.13 3478.28,3496.13 3513.28,3496.13 4085,3620.63 4106,3629
IN4: C8_GM2.2 D5_GM2.2 Q5_GM2.2 Q8_GM3.2 Q11_GM3.2 | length 1006.4
  Top Layer w10: Q5_GM2.2@4599.29,3541.13 4610.28,3552.12 4610.28,3571.13 Q5_GM2.2@4615.28,3576.13
  Top Layer w30: Q5_GM2.2@4590.28,3529.34 4611.32,3508.3 Q5_GM2.2@4613,3506.62
  Top Layer w50: Q5_GM2.2@4613,3506.62 4613,3362.09 C8_GM2.2@4624.29,3350.8
  Bottom Layer w30: Q8_GM3.2@5215,3520 5217.19,3522.19 5217.19,3560.88 Q8_GM3.2@5217.19,3569.88 5239,3591.69 v1(5239,3620)
  Bottom Layer w70: D5_GM2.2@4602,3478 5134.31,3478 5217.19,3560.88 Q8_GM3.2@5226.19,3569.88
  other v1: 4595.28,3466.13 4630.28,3466.13 4595.28,3496.13 4630.28,3496.13 5193,3620.63 5214,3629
IN5: C8_GM3.2 D5_GM3.2 Q5_GM3.2 Q8_GM4.2 Q11_GM4.2 | length 1006.4
  Top Layer w10: Q5_GM3.2@5707.29,3541.13 5718.28,3552.12 5718.28,3571.13 Q5_GM3.2@5723.28,3576.13
  Top Layer w30: Q5_GM3.2@5698.28,3529.34 5719.32,3508.3 Q5_GM3.2@5721,3506.62
  Top Layer w50: Q5_GM3.2@5721,3506.62 5721,3362.09 C8_GM3.2@5732.29,3350.8
  Bottom Layer w30: Q8_GM4.2@6323,3520 6325.19,3522.19 6325.19,3560.88 Q8_GM4.2@6325.19,3569.88 6347,3591.69 v1(6347,3620)
  Bottom Layer w70: D5_GM3.2@5710,3478 6242.31,3478 6325.19,3560.88 Q8_GM4.2@6334.19,3569.88
  other v1: 5703.28,3466.13 5738.28,3466.13 5703.28,3496.13 5738.28,3496.13 6301,3620.63 6322,3629
IN6: C8_GM4.2 D5_GM4.2 Q5_GM4.2 Q8_GM5.2 Q11_GM5.2 | length 1006.4
  Top Layer w10: Q5_GM4.2@6815.29,3541.13 6826.28,3552.12 6826.28,3571.13 Q5_GM4.2@6831.28,3576.13
  Top Layer w30: Q5_GM4.2@6806.28,3529.34 6827.32,3508.3 Q5_GM4.2@6829,3506.62
  Top Layer w50: Q5_GM4.2@6829,3506.62 6829,3362.09 C8_GM4.2@6840.29,3350.8
  Bottom Layer w30: Q8_GM5.2@7431,3520 7433.19,3522.19 7433.19,3560.88 Q8_GM5.2@7433.19,3569.88 7455,3591.69 v1(7455,3620)
  Bottom Layer w70: D5_GM4.2@6818,3478 7350.31,3478 7433.19,3560.88 Q8_GM5.2@7442.19,3569.88
  other v1: 6811.28,3466.13 6846.28,3466.13 6811.28,3496.13 6846.28,3496.13 7409,3620.63 7430,3629
IN7: C8_GM5.2 D5_GM5.2 Q5_GM5.2 Q8_GM6.2 Q11_GM6.2 | length 1006.4
  Top Layer w10: Q5_GM5.2@7923.29,3541.13 7934.28,3552.12 7934.28,3571.13 Q5_GM5.2@7939.28,3576.13
  Top Layer w30: Q5_GM5.2@7914.28,3529.34 7935.32,3508.3 Q5_GM5.2@7937,3506.62
  Top Layer w50: Q5_GM5.2@7937,3506.62 7937,3362.09 C8_GM5.2@7948.29,3350.8
  Bottom Layer w30: Q8_GM6.2@8539,3520 8541.19,3522.19 8541.19,3560.88 Q8_GM6.2@8541.19,3569.88 8563,3591.69 v1(8563,3620)
  Bottom Layer w70: D5_GM5.2@7926,3478 8458.31,3478 8541.19,3560.88 Q8_GM6.2@8550.19,3569.88
  other v1: 7919.28,3466.13 7954.28,3466.13 7919.28,3496.13 7954.28,3496.13 8517,3620.63 8538,3629
IN8: C8_GM6.2 D5_GM6.2 Q5_GM6.2 Q8_GM7.2 Q11_GM7.2 | length 1006.4
  Top Layer w10: Q5_GM6.2@9031.29,3541.13 9042.28,3552.12 9042.28,3571.13 Q5_GM6.2@9047.28,3576.13
  Top Layer w30: Q5_GM6.2@9022.28,3529.34 9043.32,3508.3 Q5_GM6.2@9045,3506.62
  Top Layer w50: Q5_GM6.2@9045,3506.62 9045,3362.09 C8_GM6.2@9056.29,3350.8
  Bottom Layer w30: Q8_GM7.2@9647,3520 9649.19,3522.19 9649.19,3560.88 Q8_GM7.2@9649.19,3569.88 9671,3591.69 v1(9671,3620)
  Bottom Layer w70: D5_GM6.2@9034,3478 9566.31,3478 9649.19,3560.88 Q8_GM7.2@9658.19,3569.88
  other v1: 9027.28,3466.13 9062.28,3466.13 9027.28,3496.13 9062.28,3496.13 9625,3620.63 9646,3629
IN9: C8_GM7.2 D5_GM7.2 Q5_GM7.2 Q8_GM8.2 Q11_GM8.2 | length 1006.4
  Top Layer w10: Q5_GM7.2@10139.29,3541.13 10150.28,3552.12 10150.28,3571.13 Q5_GM7.2@10155.28,3576.13
  Top Layer w30: Q5_GM7.2@10130.28,3529.34 10151.32,3508.3 Q5_GM7.2@10153,3506.62
  Top Layer w50: Q5_GM7.2@10153,3506.62 10153,3362.09 C8_GM7.2@10164.29,3350.8
  Bottom Layer w30: Q8_GM8.2@10755,3520 10757.19,3522.19 10757.19,3560.88 Q8_GM8.2@10757.19,3569.88 10779,3591.69 v1(10779,3620)
  Bottom Layer w70: D5_GM7.2@10142,3478 10674.31,3478 10757.19,3560.88 Q8_GM8.2@10766.19,3569.88
  other v1: 10135.28,3466.13 10170.28,3466.13 10135.28,3496.13 10170.28,3496.13 10733,3620.63 10754,3629
IN10: C8_GM8.2 D5_GM8.2 Q5_GM8.2 Q8_GM9.2 Q11_GM9.2 | length 1006.4
  Top Layer w10: Q5_GM8.2@11247.29,3541.13 11258.28,3552.12 11258.28,3571.13 Q5_GM8.2@11263.28,3576.13
  Top Layer w30: Q5_GM8.2@11238.28,3529.34 11259.32,3508.3 Q5_GM8.2@11261,3506.62
  Top Layer w50: Q5_GM8.2@11261,3506.62 11261,3362.09 C8_GM8.2@11272.29,3350.8
  Bottom Layer w30: Q8_GM9.2@11863,3520 11865.19,3522.19 11865.19,3560.88 Q8_GM9.2@11865.19,3569.88 11887,3591.69 v1(11887,3620)
  Bottom Layer w70: D5_GM8.2@11250,3478 11782.31,3478 11865.19,3560.88 Q8_GM9.2@11874.19,3569.88
  other v1: 11243.28,3466.13 11278.28,3466.13 11243.28,3496.13 11278.28,3496.13 11841,3620.63 11862,3629
IN11: C8_GM9.2 D5_GM9.2 Q2.2 Q5_GM9.2 | length 831.6
  Top Layer w10: Q5_GM9.2@12355.29,3541.13 12366.28,3552.12 12366.28,3571.13 Q5_GM9.2@12371.28,3576.13
  Top Layer w30: Q5_GM9.2@12346.28,3529.34 Q5_GM9.2@12369,3506.62
  Top Layer w50: Q5_GM9.2@12369,3506.62 12369,3362.09 C8_GM9.2@12380.29,3350.8
  Bottom Layer w50: Q2.2@12919.98,3478 Q2.2@12945,3503.02
  Bottom Layer w70: D5_GM9.2@12358,3478 Q2.2@12919.98,3478
  other v1: 12351.28,3466.13 12386.28,3466.13 12351.28,3496.13 12386.28,3496.13
ISO_A1: U1.2 Ur4.7 | length 1147.2
  Top Layer w10: v1(2499,3653) 2617,3535 2617,2933.13 v1@2591.43,2907.57
  Bottom Layer w8: 2383.8,3579.39 2396.18,3567 2420,3567 2450,3597 2450,3637 2466,3653 v1(2499,3653) ; Ur4.7@2572.39,2750.74 2572.39,2887.33 v1@2591,2905.95
  other v1: 2591,2908
ISO_A_GM1: U2_GM1.2 U3_GM1.7 | length 1166.1
  Top Layer w10: v1(3616,3653) 3734,3535 3734,2933.13 v1@3708.43,2907.57
  Bottom Layer w8: U2_GM1.2@3500.8,3593.93 3500.8,3579.39 3513.18,3567 3537,3567 3567,3597 3567,3637 3583,3653 v1(3616,3653) ; U3_GM1.7@3691,2749.13 3689.39,2750.74 3689.39,2887.33 3708,2905.95 v1(3708,2908)
ISO_A_GM2: U2_GM2.2 U3_GM2.7 | length 1166.1
  Top Layer w10: v1(4733,3653) 4851,3535 4851,2933.13 v1@4825.43,2907.57
  Bottom Layer w8: U2_GM2.2@4617.8,3593.93 4617.8,3579.39 4630.18,3567 4654,3567 4684,3597 4684,3637 4700,3653 v1(4733,3653) ; U3_GM2.7@4808,2749.13 4806.39,2750.74 4806.39,2887.33 4825,2905.95 v1(4825,2908)
ISO_A_GM3: U2_GM3.2 U3_GM3.7 | length 1166.1
  Top Layer w10: v1(5841,3653) 5959,3535 5959,2933.13 v1@5933.43,2907.57
  Bottom Layer w8: U2_GM3.2@5725.8,3593.93 5725.8,3579.39 5738.18,3567 5762,3567 5792,3597 5792,3637 5808,3653 v1(5841,3653) ; U3_GM3.7@5916,2749.13 5914.39,2750.74 5914.39,2887.33 5933,2905.95 v1(5933,2908)
ISO_A_GM4: U2_GM4.2 U3_GM4.7 | length 1166.1
  Top Layer w10: v1(6949,3653) 7067,3535 7067,2933.13 v1@7041.43,2907.57
  Bottom Layer w8: U2_GM4.2@6833.8,3593.93 6833.8,3579.39 6846.18,3567 6870,3567 6900,3597 6900,3637 6916,3653 v1(6949,3653) ; U3_GM4.7@7024,2749.13 7022.39,2750.74 7022.39,2887.33 7041,2905.95 v1(7041,2908)
ISO_A_GM5: U2_GM5.2 U3_GM5.7 | length 1166.1
  Top Layer w10: v1(8057,3653) 8175,3535 8175,2933.13 v1@8149.43,2907.57
  Bottom Layer w8: U2_GM5.2@7941.8,3593.93 7941.8,3579.39 7954.18,3567 7978,3567 8008,3597 8008,3637 8024,3653 v1(8057,3653) ; U3_GM5.7@8132,2749.13 8130.39,2750.74 8130.39,2887.33 8149,2905.95 v1(8149,2908)
ISO_A_GM6: U2_GM6.2 U3_GM6.7 | length 1166.1
  Top Layer w10: v1(9165,3653) 9283,3535 9283,2933.13 v1@9257.43,2907.57
  Bottom Layer w8: U2_GM6.2@9049.8,3593.93 9049.8,3579.39 9062.18,3567 9086,3567 9116,3597 9116,3637 9132,3653 v1(9165,3653) ; U3_GM6.7@9240,2749.13 9238.39,2750.74 9238.39,2887.33 9257,2905.95 v1(9257,2908)
ISO_A_GM7: U2_GM7.2 U3_GM7.7 | length 1166.1
  Top Layer w10: v1(10273,3653) 10391,3535 10391,2933.13 v1@10365.43,2907.57
  Bottom Layer w8: U2_GM7.2@10157.8,3593.93 10157.8,3579.39 10170.18,3567 10194,3567 10224,3597 10224,3637 10240,3653 v1(10273,3653) ; U3_GM7.7@10348,2749.13 10346.39,2750.74 10346.39,2887.33 10365,2905.95 v1(10365,2908)
ISO_A_GM8: U2_GM8.2 U3_GM8.7 | length 1166.1
  Top Layer w10: v1(11381,3653) 11499,3535 11499,2933.13 v1@11473.43,2907.57
  Bottom Layer w8: U2_GM8.2@11265.8,3593.93 11265.8,3579.39 11278.18,3567 11302,3567 11332,3597 11332,3637 11348,3653 v1(11381,3653) ; U3_GM8.7@11456,2749.13 11454.39,2750.74 11454.39,2887.33 11473,2905.95 v1(11473,2908)
ISO_A_GM9: U2_GM9.2 U3_GM9.7 | length 1166.1
  Top Layer w10: v1(12489,3653) 12607,3535 12607,2933.13 v1@12581.43,2907.57
  Bottom Layer w8: U2_GM9.2@12373.8,3593.93 12373.8,3579.39 12386.18,3567 12410,3567 12440,3597 12440,3637 12456,3653 v1(12489,3653) ; U3_GM9.7@12564,2749.13 12562.39,2750.74 12562.39,2887.33 12581,2905.95 v1(12581,2908)
ISO_B11: U74.7 U75.2 | length 224.2
  Bottom Layer w8: U74.7@12965,2794.13 12965,2939 12987.8,2961.8 U75.2@12987.8,3008.93
ISO_B_GM1: U4_GM1.7 U8_GM1.2 | length 291
  Bottom Layer w8: U4_GM1.7@2978.28,2784.13 2978.28,2860.28 3007.32,2889.32 U8_GM1.2@3007.32,3063.07
ISO_B_GM2: U4_GM2.7 U8_GM2.2 | length 291
  Bottom Layer w8: U4_GM2.7@4095.28,2784.13 4095.28,2860.28 4124.32,2889.32 U8_GM2.2@4124.32,3063.07
ISO_B_GM3: U4_GM3.7 U8_GM3.2 | length 291
  Bottom Layer w8: U4_GM3.7@5203.28,2784.13 5203.28,2860.28 5232.32,2889.32 U8_GM3.2@5232.32,3063.07
ISO_B_GM4: U4_GM4.7 U8_GM4.2 | length 291
  Bottom Layer w8: U4_GM4.7@6311.28,2784.13 6311.28,2860.28 6340.32,2889.32 U8_GM4.2@6340.32,3063.07
ISO_B_GM5: U4_GM5.7 U8_GM5.2 | length 291
  Bottom Layer w8: U4_GM5.7@7419.28,2784.13 7419.28,2860.28 7448.32,2889.32 U8_GM5.2@7448.32,3063.07
ISO_B_GM6: U4_GM6.7 U8_GM6.2 | length 291
  Bottom Layer w8: U4_GM6.7@8527.28,2784.13 8527.28,2860.28 8556.32,2889.32 U8_GM6.2@8556.32,3063.07
ISO_B_GM7: U4_GM7.7 U8_GM7.2 | length 291
  Bottom Layer w8: U4_GM7.7@9635.28,2784.13 9635.28,2860.28 9664.32,2889.32 U8_GM7.2@9664.32,3063.07
ISO_B_GM8: U4_GM8.7 U8_GM8.2 | length 291
  Bottom Layer w8: U4_GM8.7@10743.28,2784.13 10743.28,2860.28 10772.32,2889.32 U8_GM8.2@10772.32,3063.07
ISO_B_GM9: U4_GM9.7 U8_GM9.2 | length 291
  Bottom Layer w8: U4_GM9.7@11851.28,2784.13 11851.28,2860.28 11880.32,2889.32 U8_GM9.2@11880.32,3063.07
ISO_C_GM1: U4_GM1.6 U8_GM1.4 | length 291
  Bottom Layer w8: U4_GM1.6@2928.28,2784.13 2928.28,2885.28 2956,2913 U8_GM1.4@2956,3063.64
ISO_C_GM2: U4_GM2.6 U8_GM2.4 | length 291
  Bottom Layer w8: U4_GM2.6@4045.28,2784.13 4045.28,2885.28 4073,2913 U8_GM2.4@4073,3063.64
ISO_C_GM3: U4_GM3.6 U8_GM3.4 | length 291
  Bottom Layer w8: U4_GM3.6@5153.28,2784.13 5153.28,2885.28 5181,2913 U8_GM3.4@5181,3063.64
ISO_C_GM4: U4_GM4.6 U8_GM4.4 | length 291
  Bottom Layer w8: U4_GM4.6@6261.28,2784.13 6261.28,2885.28 6289,2913 U8_GM4.4@6289,3063.64
ISO_C_GM5: U4_GM5.6 U8_GM5.4 | length 291
  Bottom Layer w8: U4_GM5.6@7369.28,2784.13 7369.28,2885.28 7397,2913 U8_GM5.4@7397,3063.64
ISO_C_GM6: U4_GM6.6 U8_GM6.4 | length 291
  Bottom Layer w8: U4_GM6.6@8477.28,2784.13 8477.28,2885.28 8505,2913 U8_GM6.4@8505,3063.64
ISO_C_GM7: U4_GM7.6 U8_GM7.4 | length 291
  Bottom Layer w8: U4_GM7.6@9585.28,2784.13 9585.28,2885.28 9613,2913 U8_GM7.4@9613,3063.64
ISO_C_GM8: U4_GM8.6 U8_GM8.4 | length 291
  Bottom Layer w8: U4_GM8.6@10693.28,2784.13 10693.28,2885.28 10721,2913 U8_GM8.4@10721,3063.64
ISO_C_GM9: U4_GM9.6 U8_GM9.4 | length 291
  Bottom Layer w8: U4_GM9.6@11801.28,2784.13 11801.28,2885.28 11829,2913 U8_GM9.4@11829,3063.64
ISO_D1: U12.7 U16.2 | length 264.1
  Bottom Layer w8: U12.7@2026,2748.13 2012,2762.13 2012,2892 2030,2910 2063,2910 2084.8,2931.8 U16.2@2084.8,2956.93
ISO_D_GM1: U5_GM1.7 U20_GM1.2 | length 183.7
  Bottom Layer w8: U20_GM1.2@3201.8,2956.93 3201.8,2934.2 3235,2901 U5_GM1.7@3235,2787
ISO_D_GM2: U5_GM2.7 U20_GM2.2 | length 183.7
  Bottom Layer w8: U20_GM2.2@4318.8,2956.93 4318.8,2934.2 4352,2901 U5_GM2.7@4352,2787
ISO_D_GM3: U5_GM3.7 U20_GM3.2 | length 183.7
  Bottom Layer w8: U20_GM3.2@5426.8,2956.93 5426.8,2934.2 5460,2901 U5_GM3.7@5460,2787
ISO_D_GM4: U5_GM4.7 U20_GM4.2 | length 183.7
  Bottom Layer w8: U20_GM4.2@6534.8,2956.93 6534.8,2934.2 6568,2901 U5_GM4.7@6568,2787
ISO_D_GM5: U5_GM5.7 U20_GM5.2 | length 183.7
  Bottom Layer w8: U20_GM5.2@7642.8,2956.93 7642.8,2934.2 7676,2901 U5_GM5.7@7676,2787
ISO_D_GM6: U5_GM6.7 U20_GM6.2 | length 183.7
  Bottom Layer w8: U20_GM6.2@8750.8,2956.93 8750.8,2934.2 8784,2901 U5_GM6.7@8784,2787
ISO_D_GM7: U5_GM7.7 U20_GM7.2 | length 183.7
  Bottom Layer w8: U20_GM7.2@9858.8,2956.93 9858.8,2934.2 9892,2901 U5_GM7.7@9892,2787
ISO_D_GM8: U5_GM8.7 U20_GM8.2 | length 183.7
  Bottom Layer w8: U20_GM8.2@10966.8,2956.93 10966.8,2934.2 11000,2901 U5_GM8.7@11000,2787
ISO_D_GM9: U5_GM9.7 U20_GM9.2 | length 183.7
  Bottom Layer w8: U20_GM9.2@12074.8,2956.93 12074.8,2934.2 12108,2901 U5_GM9.7@12108,2787
ISO_E1: U12.6 U16.4 | length 232.7
  Bottom Layer w8: U12.6@1976,2748.13 1991,2763.13 1991,2908 2033.61,2950.61 U16.4@2033.61,2956.93
ISO_E_GM1: U5_GM1.6 U20_GM1.4 | length 184.2
  Bottom Layer w8: U20_GM1.4@3150.61,2956.93 3150.61,2934.66 3185,2900.28 U5_GM1.6@3185,2787
ISO_E_GM2: U5_GM2.6 U20_GM2.4 | length 184.2
  Bottom Layer w8: U20_GM2.4@4267.61,2956.93 4267.61,2934.66 4302,2900.28 U5_GM2.6@4302,2787
ISO_E_GM3: U5_GM3.6 U20_GM3.4 | length 184.2
  Bottom Layer w8: U20_GM3.4@5375.61,2956.93 5375.61,2934.66 5410,2900.28 U5_GM3.6@5410,2787
ISO_E_GM4: U5_GM4.6 U20_GM4.4 | length 184.2
  Bottom Layer w8: U20_GM4.4@6483.61,2956.93 6483.61,2934.66 6518,2900.28 U5_GM4.6@6518,2787
ISO_E_GM5: U5_GM5.6 U20_GM5.4 | length 184.2
  Bottom Layer w8: U20_GM5.4@7591.61,2956.93 7591.61,2934.66 7626,2900.28 U5_GM5.6@7626,2787
ISO_E_GM6: U5_GM6.6 U20_GM6.4 | length 184.2
  Bottom Layer w8: U20_GM6.4@8699.61,2956.93 8699.61,2934.66 8734,2900.28 U5_GM6.6@8734,2787
ISO_E_GM7: U5_GM7.6 U20_GM7.4 | length 184.2
  Bottom Layer w8: U20_GM7.4@9807.61,2956.93 9807.61,2934.66 9842,2900.28 U5_GM7.6@9842,2787
ISO_E_GM8: U5_GM8.6 U20_GM8.4 | length 184.2
  Bottom Layer w8: U20_GM8.4@10915.61,2956.93 10915.61,2934.66 10950,2900.28 U5_GM8.6@10950,2787
ISO_E_GM9: U5_GM9.6 U20_GM9.4 | length 184.2
  Bottom Layer w8: U20_GM9.4@12023.61,2956.93 12023.61,2934.66 12058,2900.28 U5_GM9.6@12058,2787
LE_LATCH1: U22.55 Ur6.13 | length 1019.1
  Bottom Layer w8: Ur6.13@6182.5,671.5 6226.5,671.5 6262,636 7008,636 7089.37,717.37 U22.55@7089.37,781.16
LE_LATCH2: U22.53 Ur8.13 | length 1133
  Top Layer w10: v1@6583,1641 6583,1606 6625,1564 6625,1338 7091,872 v1(7091,865)
  Bottom Layer w8: v1(6582,1650) 6583,1651 Ur8.13@6583,1700 ; v1(7091,865) 7091,863 7120.87,833.13 U22.53@7120.87,781.16
LE_LATCH3: U22.54 Ur7.13 | length 1130.9
  Top Layer w10: v1(6239,1135) 6259,1155 6782,1155 7051,886 v1(7051,872)
  Bottom Layer w8: Ur7.13@6182.5,1134.5 6238.5,1134.5 v1(6239,1135) ; v1(7051,872) 7051,854 7064,841 7090,841 7105.12,825.88 U22.54@7105.12,781.16